# Altium PCB PCB1.PcbDoc
Units mm, origin at the board's own origin, x right, y up, seen from the top; angles counter-clockwise.
Board outline 48.75 x 28.25 mm, 2 copper layers (Top Layer, Bottom Layer); 27 components, 13 nets, 113 pads, 0 vias.
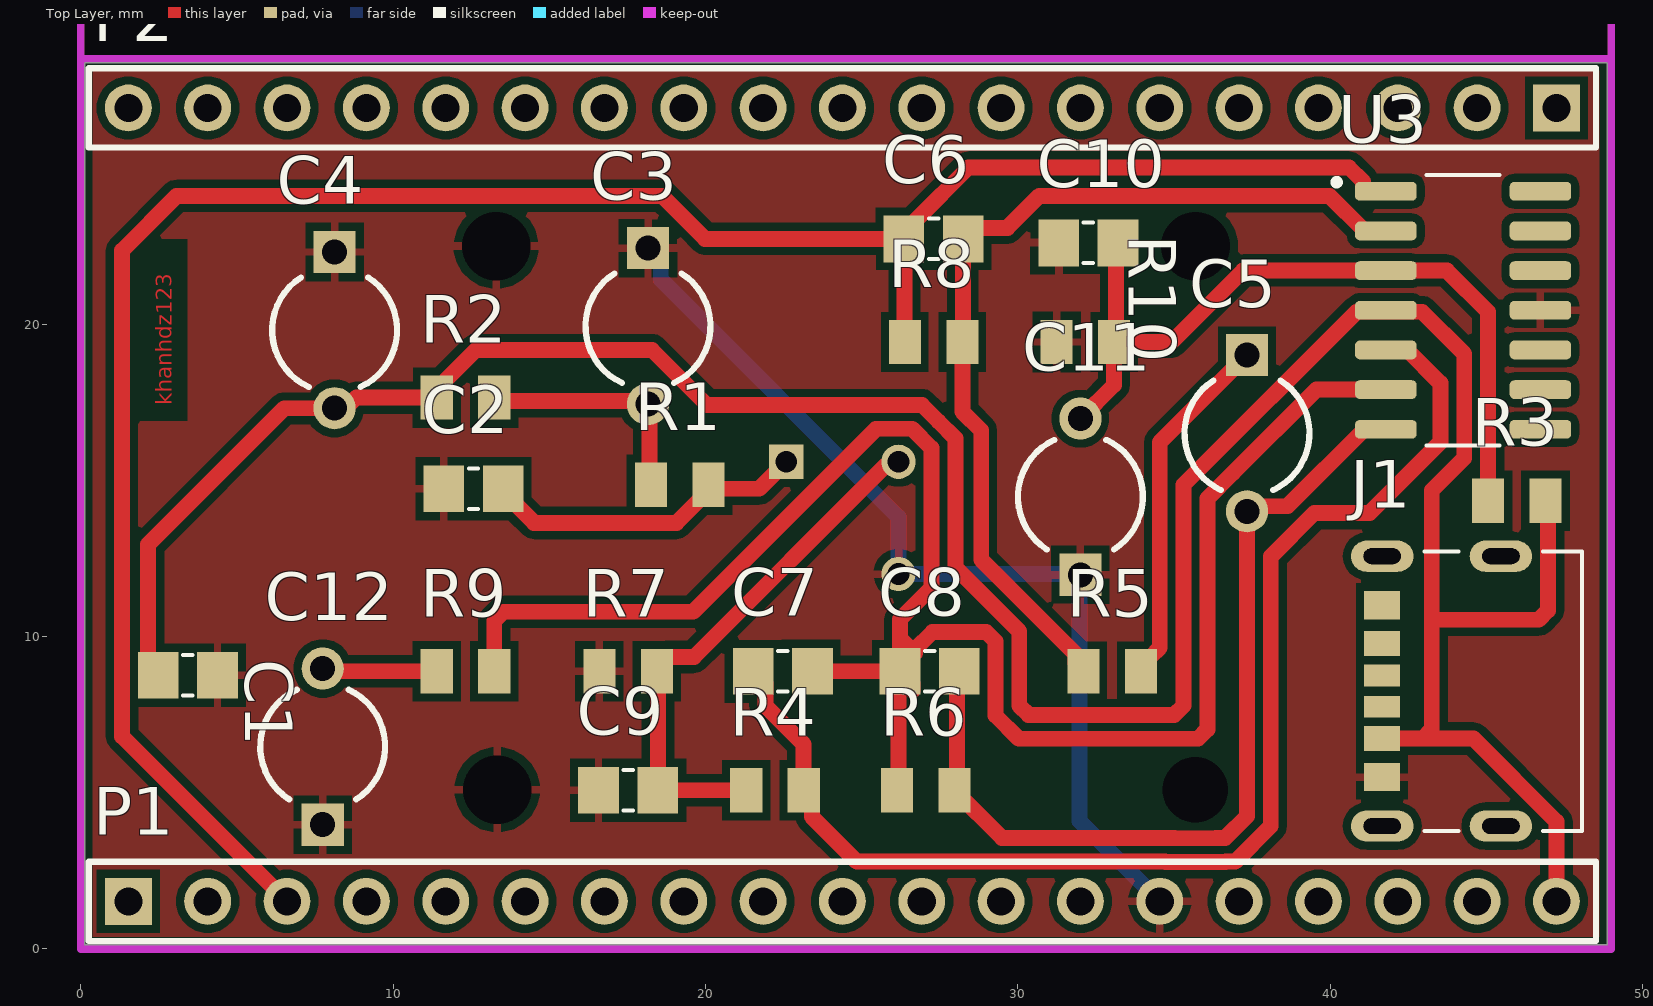
[diagram p0: Top Layer view]
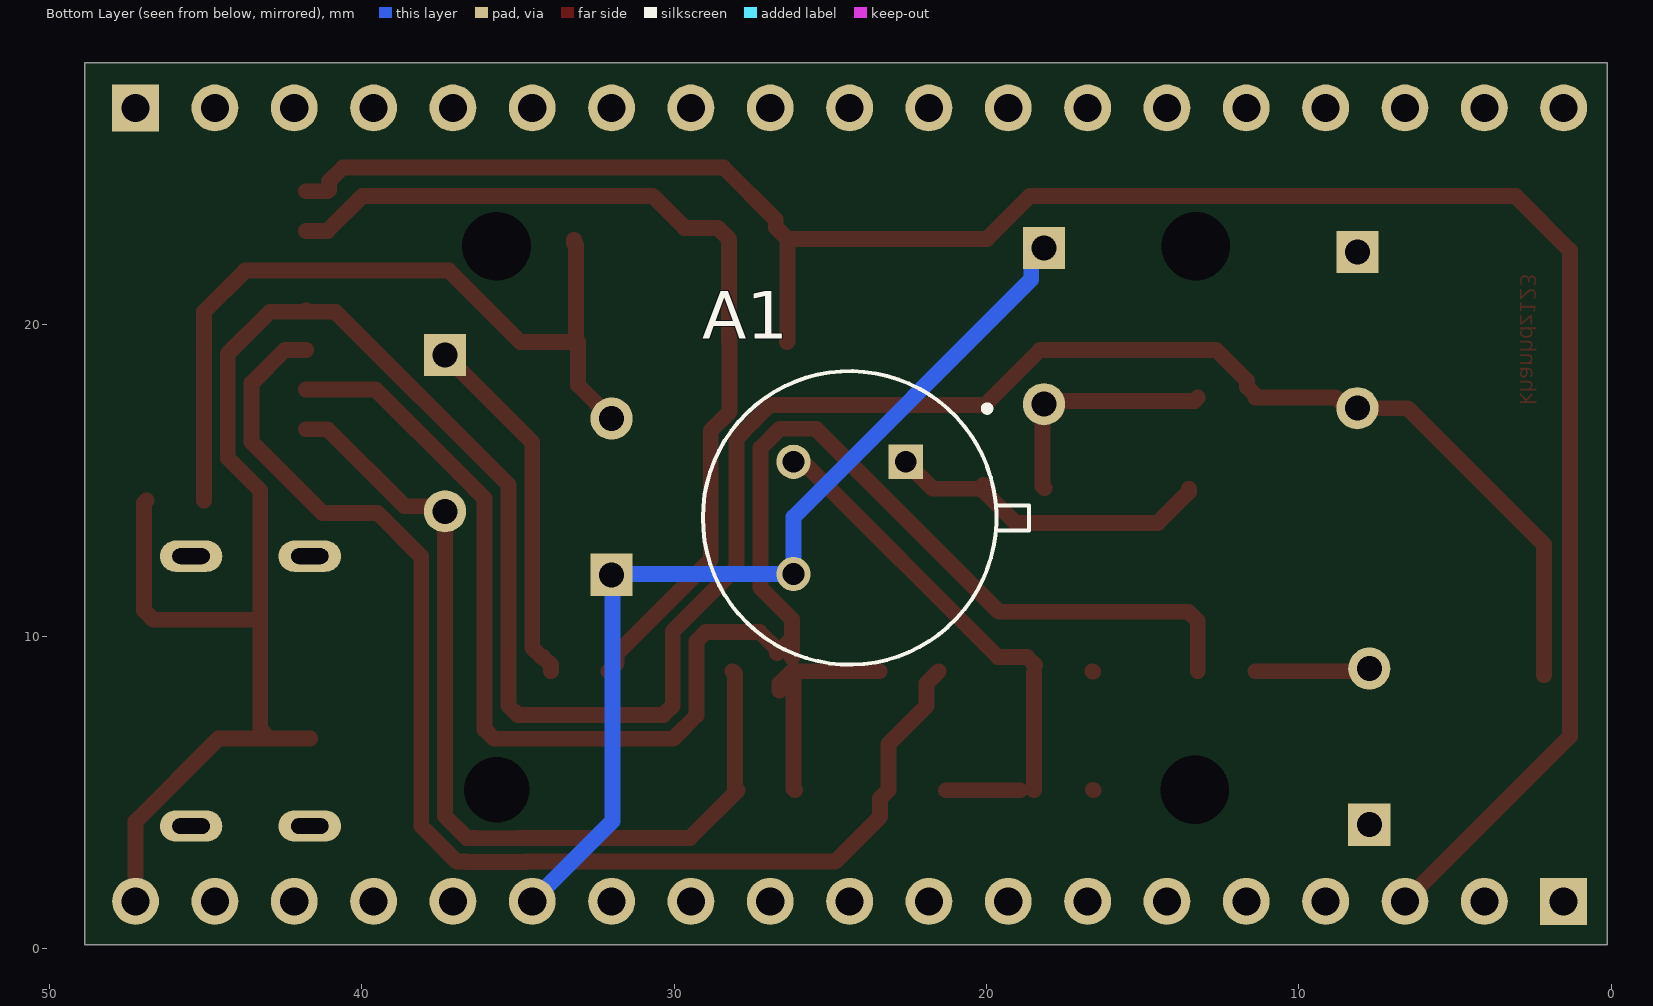
[diagram p1: Bottom Layer view, seen from below]

## Layer stack, top to bottom
Top Solder: solder mask 0.0102, Solder Resist, Dk 3.5
Top Layer: signal copper 0.0356
Dielectric 1: dielectric 0.32, FR-4, Dk 4.8
Bottom Layer: signal copper 0.0356
Bottom Solder: solder mask 0.0102, Solder Resist, Dk 3.5

## Board outline
0.127,0.127 48.873,0.127 48.873,28.373 0.127,28.373

## Design rules (kind name [scope] priority, off if disabled: settings)
Clearance [All] p1: gap=0.254 ignorepadtopadclearanceinfootprint=FALSE except(0: Arc-Hole Track-Hole SMDPad-Hole THPad-Hole Via-Hole Fill-Hole Poly-Hole Region-Hole Text-Hole)
PolygonConnect [All] p1: connectstyle=Relief reliefconductorwidth=0.254 reliefentries=4 polygonreliefangle="90 Angle" airgapwidth=0.254
RoomDefinition Sheet1 [InComponentClass('Sheet1')] p1: confinementstyle=ConfineIn formatcopy=TRUE lockcomponents=FALSE outline -0.134,0.066 48.866,0.066 48.866,28.5 -0.134,28.5
RoutingVias [All] p1: holewidth=0.711 width=1.27 viastyle="Through Hole" minholewidth=0.711 minwidth=1.27 maxholewidth=0.711 maxwidth=1.27
SolderMaskExpansion [All] p1: expansion=0.102 istentingtop=FALSE
Width [All] p1: maxlimit=1.27 minlimit=0.381 preferedwidth=0.508
30 further rules are at their usual default settings.

## Components (designator, comment, footprint, x,y, rotation, side; value= is the part's Value field where it differs from the comment)
A1 "IRA-S500ST01A01" TO254P940H490-3 24.384,13.8 r0 bottom locked
C1 "GRM21BR71A106KE51K" CAPC2012X135N 3.429,8.763 r0 top
C2 "GRM21BR71A106KE51K" CAPC2012X135N 12.573,14.732 r180 top
C3 "100u/ 16V" CAPR5-4X5 18.161,19.939 r270 top value=100pF
C4 "100u/ 16V" CAPR5-4X5 8.128,19.812 r270 top value=100pF
C5 "10u/ 16V" CAPR5-4X5 37.338,16.51 r270 top value=100pF
C6 "GRM21BR71A106KE51K" CAPC2012X135N 27.305,22.733 r180 top
C7 "GRM21BR71A106KE51K" CAPC2012X135N 22.479,8.89 r0 top
C8 "GRM21BR71A106KE51K" CAPC2012X135N 27.178,8.89 r0 top
C9 "GRM21BR71A106KE51K" CAPC2012X135N 17.526,5.08 r180 top
C10 "GRM21BR71A106KE51K" CAPC2012X135N 32.258,22.606 r180 top
C11 "10u/ 16V" CAPR5-4X5 32.004,14.478 r90 top value=100pF
C12 "47u/ 25V" CAPR5-4X5 7.747,6.477 r90 top value=100pF
J1 "UJC-HP-3-SMT-TR" CUI_UJC-HP-3-SMT-TR 41.666,8.253 r90 top
P1 "Header 19" HDR1X19 1.524,1.524 r0 top
P2 "Header 19" HDR1X19 47.244,26.924 r180 top locked
R1 "CRT0805-BY-1002EAS" RESC2012X65N 19.177,14.859 r180 top
R2 "CRT0805-BY-1002EAS" RESC2012X65N 12.319,17.653 r180 top
R3 "CRT0805-BY-1002EAS" RESC2012X65N 45.974,14.351 r0 top
R4 "CRT0805-BY-1002EAS" RESC2012X65N 22.225,5.08 r0 top
R5 "CRT0805-BY-1002EAS" RESC2012X65N 33.02,8.89 r180 top
R6 "CRT0805-BY-1002EAS" RESC2012X65N 27.051,5.08 r0 top
R7 "CRT0805-BY-1002EAS" RESC2012X65N 17.526,8.89 r0 top
R8 "CRT0805-BY-1002EAS" RESC2012X65N 27.305,19.431 r180 top
R9 "CRT0805-BY-1002EAS" RESC2012X65N 12.319,8.89 r0 top
R10 "CRT0805-BY-1002EAS" RESC2012X65N 32.162,19.431 r0 top
U3 "LM324DG4" SOIC127P600X175-14N 44.258,20.447 r0 top

## Footprints (in the part's own frame and the unit in brackets; to place one, negate y for a bottom-side part, rotate by r counter-clockwise, add the part's x,y. Pads: shape width x height; smd on the part's side, far side on the other; paste and mask are expansions set on the pad)
CAPC2012X135N [mm]
  rect 1.3x1.5 smd: 1(-0.95,0) 2(0.95,0)
  silkscreen extent -0.15,-0.65 0.15,0.65
CAPR5-4X5 [mm] "Capacitor; 2 Leads"
  rect 1.35x1.35 hole 0.8: 1(-2.5,0)
  round 1.35 hole 0.8: 2(2.5,0)
  silkscreen extent -1.69,-2 1.82,2
CUI_UJC-HP-3-SMT-TR [mm]
  rect 0.7x1.15 smd: A5(-0.5,0.005) B5(0.5,0.005)
  rect 0.8x1.15 smd: A9(1.52,0.005) B9(-1.52,0.005)
  rect 0.9x1.15 smd: A12(2.75,0.005) B12(-2.75,0.005)
  oval 1x2 hole 0.5 slot 1.2 at 90 deg: S1(-4.32,0) S2(4.32,0) S3(-4.32,-3.8) S4(4.32,-3.8)
  silkscreen extent -4.47,-6.4 4.47,-1.35
HDR1X19 [mm] "Connector; Header; 19 Position"
  rect 1.5x1.5 hole 0.9: 1(0,0)
  round 1.5 hole 0.9: 2(2.54,0) 3(5.08,0) 4(7.62,0) 5(10.16,0) 6(12.7,0) 7(15.24,0) 8(17.78,0) 9(20.32,0) 10(22.86,0) 11(25.4,0) 12(27.94,0) 13(30.48,0) 14(33.02,0) 15(35.56,0) 16(38.1,0) 17(40.64,0) 18(43.18,0) 19(45.72,0)
  silkscreen extent -1.27,-1.27 46.99,1.27
RESC2012X65N [mm]
  rect 1.03x1.42 smd: 1(-0.92,0) 2(0.92,0)
  body extent -1,-0.63 1,0.63, height 0.65
SOIC127P600X175-14N [mm]
  rrect50% 1.97x0.6 smd: 1(-2.475,3.81) 2(-2.475,2.54) 3(-2.475,1.27) 4(-2.475,0) 5(-2.475,-1.27) 6(-2.475,-2.54) 7(-2.475,-3.81) 8(2.475,-3.81) 9(2.475,-2.54) 10(2.475,-1.27) 11(2.475,0) 12(2.475,1.27) 13(2.475,2.54) 14(2.475,3.81)
  silkscreen extent -4.15,-4.33 1.17,4.33, body extent -3,-4.33 3,4.33, height 1.75
TO254P940H490-3 [mm]
  rect 1.1x1.1 hole 0.7: 1(-1.796,-1.796)
  round 1.1 hole 0.7: 2(1.796,-1.796) 3(1.796,1.796)
  silkscreen extent -5.75,-4.7 4.7,4.7

## Part data
A1: "Pyroelectric Infrared Sensor, 2vdc-15vdc", Package=None, Availability=Unavailable, MP=IRA-S500ST01A01, Price=None
C1 C2 C6 C7 C8 C9 C10: "Cap Ceramic 10uF 10V X7R 10% SMD 0805 125Â°C Embossed T/R", Package=None, Availability=Unavailable, MP=GRM21BR71A106KE51K, Price=None
C3 C4 C5 C11 C12: library part Cap2, "Capacitor", PackageDescription="Capacitor; 2 Leads", PackageReference=CAPR5-4X5, Published=23-Sep-2002, Publisher="Altium Limited"
J1: "Type C, 3 A, Right Angle, Surface Mount (SMT), Power-Only USB Receptacle", Package=None, Availability=Unavailable, MP=UJC-HP-3-SMT-TR, Price=None
P1 P2: "Header, 19-Pin", LatestRevisionDate=17-Jul-2002, LatestRevisionNote="Re-released for DXP Platform.", Publisher="Altium Limited"
R1 R2 R3 R4 R5 R6 R7 R8 R9 R10: "10 kOhms Â±0.1% 0.125W, 1/8W Chip Resistor 0805 (2012 Metric) Anti-Sulfur, Current Sense Thin Film", Package="2012 Stackpole", Availability="In Stock", Check_prices=https://www.snapeda.com/parts/CRT0805-BY-1002EAS/Bourns/view-part/974764/?ref=eda, MF=Bourns, MP=CRT0805-BY-1002EAS, Price=None, SnapEDA_Link=https://www.snapeda.com/parts/CRT0805-BY-1002EAS/Bourns/view-part/974764/?ref=snap
U3: "4-Channel industry standard operational amplifier 14-SOIC 0 to 70", Package="SOIC-14 Texas Instruments", Availability="In Stock", Check_prices=https://www.snapeda.com/parts/LM324DG4/Texas+Instruments/view-part/?ref=eda, MF="Texas Instruments", MP=LM324DG4, Price=None, Purchase-URL=https://pricing.snapeda.com/search/part/LM324DG4/?ref=eda, SnapEDA_Link=https://www.snapeda.com/parts/LM324DG4/Texas+Instruments/view-part/?ref=snap

## Free pads (board coordinates)
  round 1.524 hole 2.2: 2(35.687,22.5) 6(13.3,22.5) 9(13.335,5.1)
  round 1.524 hole 2.1: 8(35.687,5.1)

## Nets (pads, with @x,y where several pads share a name; then routed paths per layer and width w, separated by ;. In a path a pad name is that pad's centre, name@x,y a point inside that pad or via, vN(x,y) a via of type N, cw(c..) or ccw(c..) an arc to the next point about the centre after c; other vN are vias at no path point)
1IN+: C10.1 C11.2 R3.1 R10.2 U3.3 | length 25.7
  Top Layer w0.508: C11.2 33.082,18.056 R10.2 ; C10.1@33.208,22.706 C10.1 33.145,22.543 33.145,19.494 R10.2 ; R3.1 45.054,20.401 43.738,21.717 U3.3 37.211,21.717 34.925,19.431 R10.2
1IN-: C6.1 R5.2 R8.1 U3.2 | length 30
  Top Layer w0.508: R5.2 31.839,9.151 31.839,9.453 28.829,12.463 28.829,16.599 28.225,17.203 R8.1 28.24,19.446 28.24,22.718 C6.1 28.605,23.083 29.667,23.083 30.692,24.108 39.977,24.108 41.098,22.987 U3.2
2IN+: C7.1 R4.2 U3.5 | length 40.9
  Top Layer w0.508: C7.1 21.925,8.494 21.925,7.772 23.145,6.552 R4.2 23.406,4.819 23.406,4.235 24.847,2.794 34.712,2.794 34.726,2.78 36.648,2.78 36.662,2.794 36.957,2.794 38.1,3.937 38.1,12.561 39.501,13.962 41.267,13.962 43.53,16.225 43.53,18.115 42.468,19.177 U3.5
2IN-: C7.2 C8.1 R6.1 R9.2 U3.6 | length 60.7
  Top Layer w0.508: R9.2 13.239,10.497 13.537,10.795 19.605,10.795 25.464,16.654 26.618,16.654 27.238,16.034 27.238,11.566 26.228,10.556 26.228,10.148 26.228,9.944 ; C7.2 26.101,8.89 26.179,8.812 26.179,5.128 R6.1 ; C8.1 26.624,8.494 C8.1@26.624,8.276 ; C8.1@26.228,9.332 26.228,9.944 ; U3.6 39.559,17.907 36.892,15.24 36.068,14.416 36.068,7.029 35.77,6.731 30.03,6.731 29.286,7.475 29.286,9.326 29.286,9.85 28.988,10.148 27.268,10.148 26.705,9.585 26.705,9.467 26.228,9.944
2OUT: C5.2 C8.2 R6.2 U3.7 | length 29.5
  Top Layer w0.508: C8.2 28.049,8.811 28.049,5.158 R6.2 29.495,3.556 33.781,3.556 33.783,3.557 35.026,3.557 35.042,3.542 36.332,3.542 36.346,3.556 36.641,3.556 37.338,4.253 C5.2 37.499,14.171 38.632,14.171 41.098,16.637 U3.7
5V: C1.1 C4.2 J1.B9 P1.19 R2.2 R3.2 U3.4 | length 97.3
  Top Layer w0.508: C1.1@2.159,8.763 2.159,12.954 6.517,17.312 C4.2 ; C4.2@8.148,17.165 8.336,17.165 8.824,17.653 R2.2 ; R2.2@11.359,17.693 11.66,17.994 11.66,18.189 12.648,19.177 18.288,19.177 20.049,17.416 26.934,17.416 27.463,16.887 28,16.35 28,12.214 30.048,10.166 30.048,7.791 30.346,7.493 35.008,7.493 35.306,7.791 35.306,14.859 40.848,20.401 41.737,20.401 U3.4 41.829,20.401 42.941,20.401 44.292,19.05 44.292,15.717 43.252,14.677 43.252,10.541 ; J1.B9 44.592,6.733 47.244,4.081 P1.19 ; 42.954,6.737 43.252,7.035 43.252,10.541 ; R3.2 46.974,14.271 46.974,10.839 46.676,10.541 43.252,10.541
GND: A1.3 C1.2 C2.2 C3.1 C4.1 C9.2 C10.2 C11.1 C12.1 J1.B12 P1.14 pad.6 pad.9 R7.1 R10.1 U3.11 | length 31.1
  Top Layer w0.508: C9.2 C9.2@16.591,5.095 ; R7.1@16.591,8.875 R7.1
  Bottom Layer w0.508: C3.1 18.569,22.031 18.569,21.436 26.18,13.825 A1.3 31.978,12.004 31.978,4.09 P1.14
NetA1_1: A1.1 C2.1 R1.1 | length 10.6
  Top Layer w0.508: C2.1 13.523,14.632 14.514,13.641 19.074,13.641 R1.1@20.097,14.664 ; R1.1 R1.1@20.097,14.664 ; A1.1 21.724,14.732 20.165,14.732 R1.1@20.097,14.664
NetA1_2: A1.2 C9.1 R4.1 R7.2 | length 16.6
  Top Layer w0.508: R7.2@18.446,9.085 18.707,9.346 19.633,9.346 25.77,15.483 26.067,15.483 A1.2 ; C9.1 R7.2@18.476,8.86 ; C9.1@18.926,5.08 R4.1
NetC3_2: C3.2 R1.2 R2.1 | length 7.7
  Top Layer w0.508: R2.1 13.346,17.546 18.054,17.546 C3.2 18.209,17.391 18.209,14.811 R1.2@18.145,14.747
NetC5_1: C5.1 R5.1 | length 11.5
  Top Layer w0.508: R5.1 33.94,9.085 34.201,9.346 34.246,9.346 34.544,9.644 34.544,16.216 C5.1@37.298,18.97
NetC12_2: C12.2 R9.1 | length 3.7
  Top Layer w0.508: C12.2 7.834,8.89 R9.1
OUTPUT: C6.2 P1.3 R8.2 U3.1 | length 69.6
  Top Layer w0.508: P1.3 1.321,6.807 1.321,22.358 3.071,24.108 18.609,24.108 19.984,22.733 C6.2 ; R8.2 26.37,19.446 26.37,22.718 26.751,23.099 26.751,23.347 28.423,25.019 40.605,25.019 41.052,24.572 41.052,24.303 41.098,24.257 U3.1
pads on no net: J1.A5 J1.A9 J1.A12 J1.B5 J1.S1 J1.S2 J1.S3 J1.S4 P1.1 P1.2 P1.4 P1.5 P1.6 P1.7 P1.8 P1.9 P1.10 P1.11 P1.12 P1.13 P1.15 P1.16 P1.17 P1.18 P2.1 P2.2 P2.3 P2.4 P2.5 P2.6 P2.7 P2.8 P2.9 P2.10 P2.11 P2.12 P2.13 P2.14 P2.15 P2.16 P2.17 P2.18 P2.19 U3.8 U3.9 U3.10 U3.12 U3.13 U3.14

## Polygon pours and split planes (outlines as drawn)
GND on Top Layer "GND_L01_P001" (solid, remove dead copper, pour order 1): 0.254,28.194 0.254,0.381 0.127,0.254 48.768,0.254 48.768,28.321

## Keep-outs
Top Layer:
  lines w0.254: 0,28.5 49,28.5 ; 0,30.099 0,0 49,0 49,30 49.022,30 49.022,30.099 ; 52.949,24.003 52.949,24.13 ; 140.325,-7.874 140.325,24.003

## Other copper
Top Layer:
  text "khanhdz123" at 2.921,17.399 h0.51 r90